# Altium PCB PCB1.PcbDoc
Units mil, origin at the board's own origin, x right, y up, seen from the top; angles counter-clockwise.
Board outline 3450.03 x 1820.03 mil, 2 copper layers (Top Layer, Bottom Layer); 17 components, 11 nets, 40 pads, 0 vias.
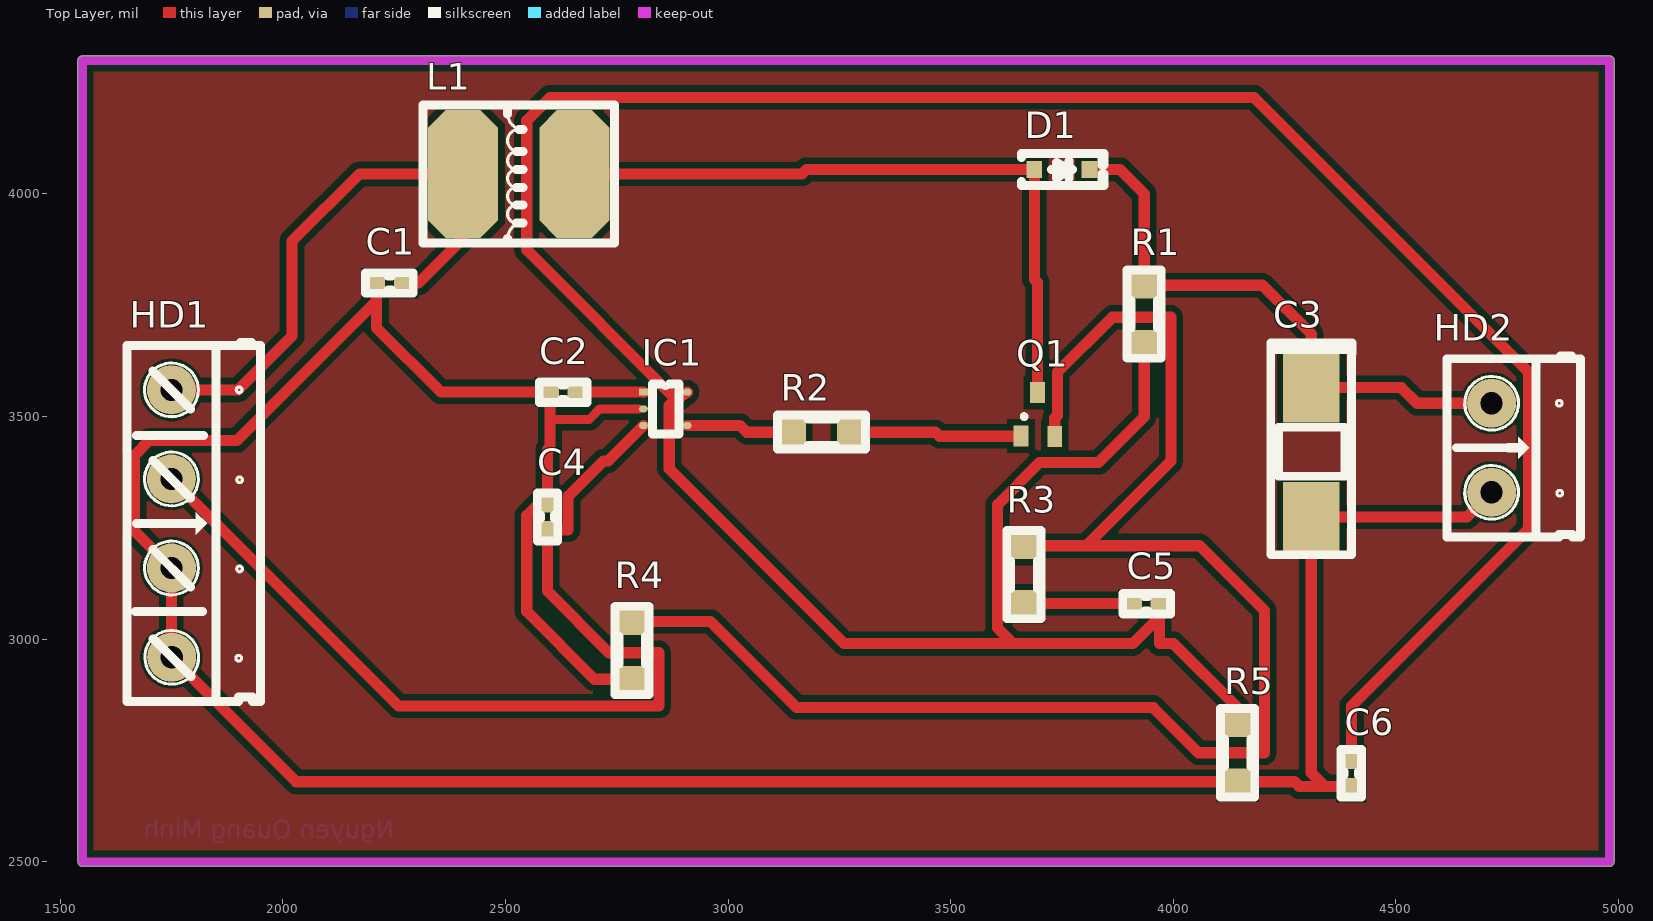
[diagram p0: Top Layer view]
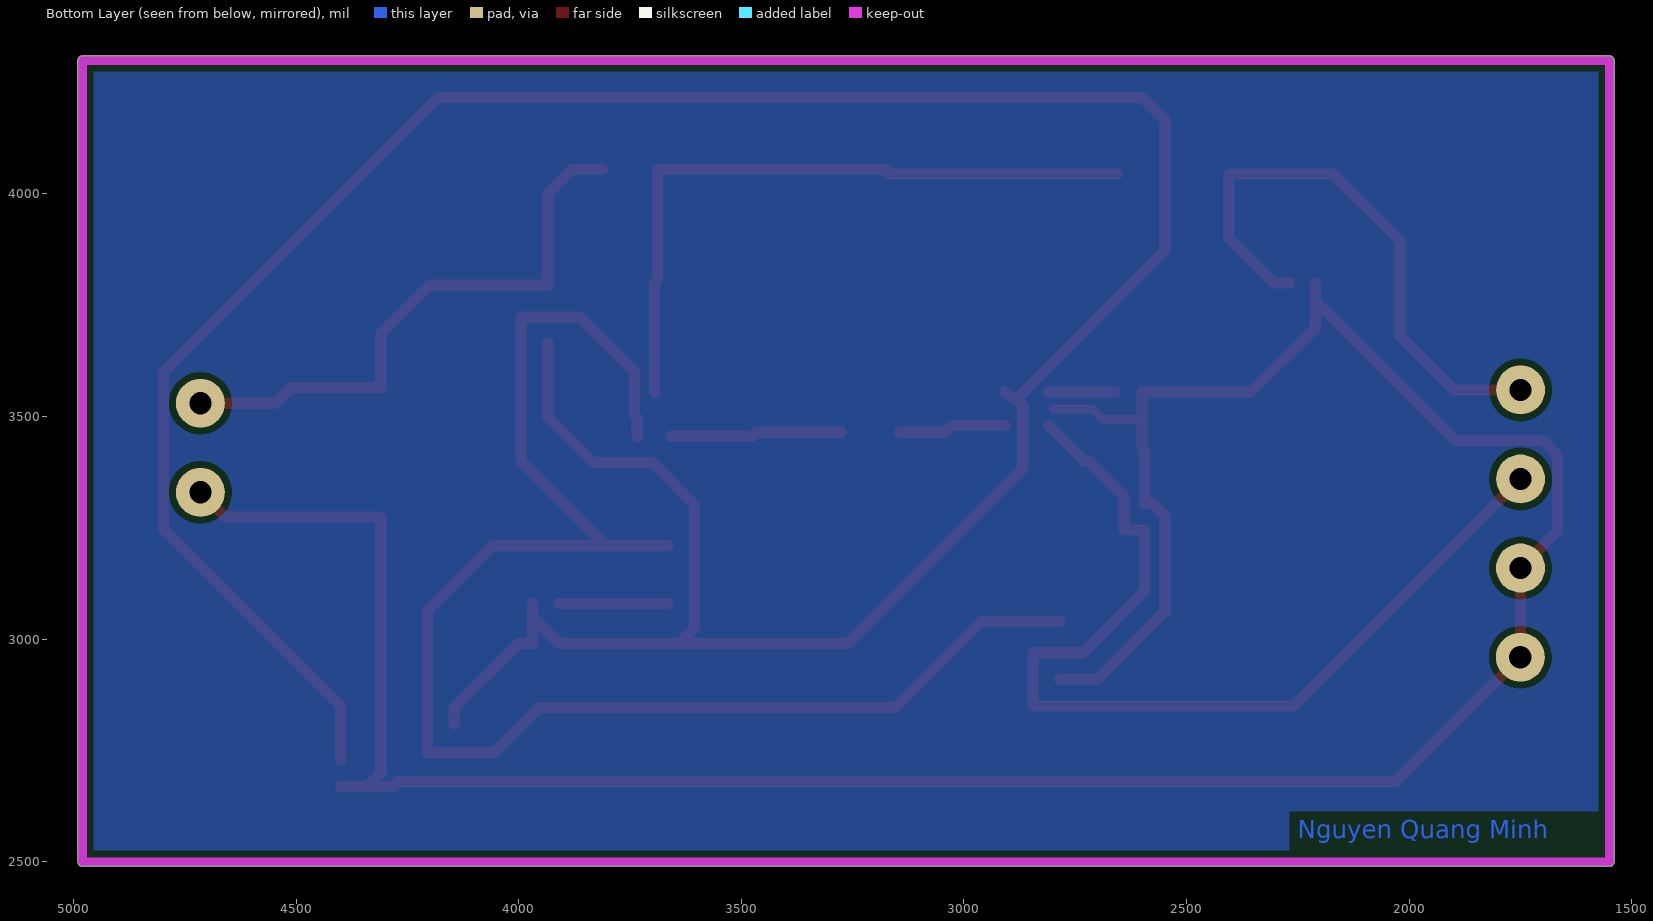
[diagram p1: Bottom Layer view, seen from below]
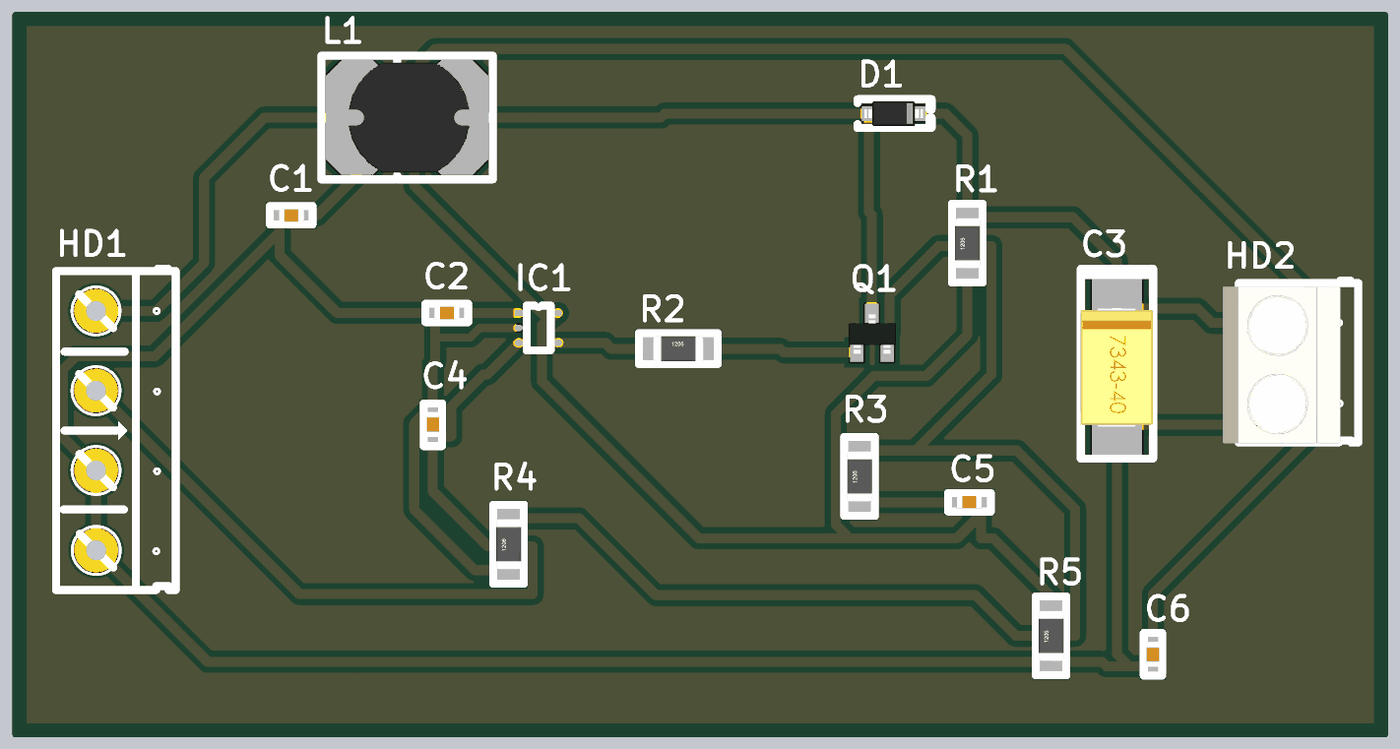
[diagram p2: 3D render of the assembled board from above, using the file's embedded part models]

## Layer stack, top to bottom
Top Solder: solder mask 0.4, Solder Resist, Dk 3.5
Top Layer: signal copper 1.4
Dielectric 1: dielectric 12.6, FR-4, Dk 4.8
Bottom Layer: signal copper 1.4
Bottom Solder: solder mask 0.4, Solder Resist, Dk 3.5

## Board outline
1550,2489.99 cw(c1550,2500) 1539.98,2500 1539.98,4300 cw(c1550,4300) 1550,4310.02 4980,4310.02 cw(c4980,4300) 4990.02,4300 4990.02,2500 cw(c4980,2500) 4980,2489.99

## Design rules (kind name [scope] priority, off if disabled: settings)
Clearance [All] p1: gap=15 ignorepadtopadclearanceinfootprint=FALSE
PolygonConnect [All] p1: connectstyle=Relief reliefconductorwidth=10 reliefentries=4 polygonreliefangle="90 Angle" airgapwidth=10
RoomDefinition "tu lam bai 1" [InComponentClass('tu lam bai 1')] p1: confinementstyle=ConfineIn formatcopy=TRUE lockcomponents=FALSE outline 11245,1310 10625,1310 10625,1985 11245,1985
RoutingLayers [All] p1: top layer_v5=TRUE bottom layer_v5=FALSE
RoutingVias [All] p1: holewidth=28 width=50 viastyle="Through Hole" minholewidth=28 minwidth=50 maxholewidth=28 maxwidth=50
SolderMaskExpansion [All] p1: expansion=4 istentingtop=FALSE
Width [All] p1: maxlimit=30 minlimit=20 preferedwidth=25
29 further rules are at their usual default settings.

## Components (designator, comment, footprint, x,y, rotation, side; value= is the part's Value field where it differs from the comment)
C1 "102" "tu 0603" 2240,3800 r180 top
C2 "102" "tu 0603" 2630,3555 r180 top
C3 "470uF" "tu tantalum smd7343" 4310,3420 r270 top
C4 "102" "tu 0603" 2594.53,3275 r270 top
C5 "102" "tu 0603" 3939.53,3080 r0 top
C6 "102" "tu 0603" 4400,2698.5 r90 top
D1 "S4" "DIODE SOD-123" 3750,4055 r0 top
HD1 "Header 4" HED4 1750,3560 r270 top
HD2 "Header 2" HED2 4715,3530 r270 top
IC1 "IRS2505" IRS2505 2810,3554.8 r0 top
L1 "47uH SMD" "Cuon Cam 7x7x5" 2380,4045 r270 top
Q1 "Si2302DS" SOT23 3695,3505 r0 top
R1 "1k" SM-RES-1206 3935,3665 r90 top value="R1/4W - 1K"
R2 "1k" SM-RES-1206 3145,3465 r0 top value="R1/4W - 1K"
R3 "1k" SM-RES-1206 3665,3080 r90 top value="R1/4W - 1K"
R4 "1k" SM-RES-1206 2785,2910 r90 top value="R1/4W - 1K"
R5 "1k" SM-RES-1206 4145,2680 r90 top value="R1/4W - 1K"

## Footprints (in the part's own frame and the unit in brackets; to place one, negate y for a bottom-side part, rotate by r counter-clockwise, add the part's x,y. Pads: shape width x height; smd on the part's side, far side on the other; paste and mask are expansions set on the pad)
"Cuon Cam 7x7x5" [mm] "Cuon Cam 7x7x5"
  oct 7.3x4 smd: 1(0,0.635) 2(0,6.985)
  silkscreen extent -3.94,-1.65 3.94,9.27, body extent -3.5,0.07 3.5,7.8, height 5.02
"DIODE SOD-123" [mm] "SOD-123"
  rect 0.9x0.95 smd: 1(-1.575,0) 2(1.575,0)
  silkscreen extent -2.3,-0.92 2.41,0.92, body extent -1.86,-0.78 1.86,0.77, height 1.35
HED2 [mil] "Header 2, 2 pin, hight 300mil, Pin to Pin 200, Colour Green"
  round 110 hole 50: 1(0,0) 2(200,0)
  silkscreen extent -106,-100 300,200, body extent -92,-140 302,155, height 394
HED4 [mil] "Header 4, 4 pin, hight 300mil, Pin to Pin 200, Colour Green"
  round 110 hole 50: 1(0,0) 2(200,0) 3(400.06,0.06) 4(600.39,0.39)
  silkscreen extent -106,-100 700,200
IRS2505 [mm]
  rect 0.5x0.4 smd: 1(0,0)
  oval 0.5x0.4 smd: 2(0,-0.95) 3(0,-1.9) 4(2.5,-1.9) 5(2.5,0)
  silkscreen extent 0.51,-2.37 2.03,0.48
SM-RES-1206 [mil]
  rect 60x65 smd: 1(0,0) 2(130,0)
  silkscreen extent -34,-38 164,39, body extent 2,-31 128,32, height 40
SOT23 [mm] "SOT 23 _ 1-3-2"
  rect 0.85x1.2 smd: 1(-0.94,-1.245) 2(0.986,-1.25) 3(0.005,1.25)
  silkscreen extent -0.88,-0.25 -0.64,0, body extent -1.47,-1.33 1.53,1.17, height 1.06
"tu 0603" [mm] "Chip Capacitor, 2-Leads, Body 1,60x0,80mm, IPC Medium Density"
  rect 1x0.95 smd mask+0.076: 1(-0.75,0) 2(0.75,0)
  silkscreen extent -1.35,-0.58 1.37,0.58, body extent -0.8,-0.4 0.8,0.4, height 0.9
"tu tantalum smd7343" [mm]
  rect 4x3.2 smd: 1(-3.7,0) 2(3.7,0)
  silkscreen extent -6.23,-2.31 5.85,2.31, body extent -3.75,-2.33 3.85,2.27, height 3.99

## Part data
C1 C2 C4 C5 C6: library part "Tu 0603 102 50V 10%", "Dán", Chung_Loai=Dán, Don_Vi=Con, Ma_Hang=MH004566, So_Chan=2, Ten_Linh_Kien="Tụ 0603 102-1nF 10% 50V"
C3: library part "Tu tantalum 470uF 10V SMD7343", "Dán", Chung_Loai=Dán, Don_Vi=Con, Ma_Hang=MH001956, So_Chan=2, Ten_Linh_Kien="Tụ tantalum 477A-470uF 10V SMD7343"
D1: library part "Diode S4", "Dán", Chung_Loai=Dán, Don_Vi=Con, Ma_Hang=MH005519, Ten_Linh_Kien="Diode S4 SOD123 ( 1N5819 SOD123)"
HD1: library part Hed4, "Header 4 (Green)"
HD2: library part Hed2, "Header 2 (Green)"
L1: library part "CUON CAM 47uH SMD", "Dán", Chung_Loai=Dán, Don_Vi=Con, Ma_Hang=MH004211, Ten_Linh_Kien="Cuộn Cảm 47uH 7x7x4MM CD74R"
Q1: "N-Channel MOSFET", LatestRevisionDate=17-Jul-2002, LatestRevisionNote="Re-released for DXP Platform.", PackageDescription="TO, Flat Index; 3 In-Line, Axial Leads; Body Dia. 4.6mm; Lead Dia. 0.5 mm (max)", PackageReference=E3, PackageVersion=1995/1996, Published=8-Jun-2000, Publisher="Altium Limited"
R1 R2 R3 R4 R5: library part R, "Resistor 1/4W"

## Nets (pads, with @x,y where several pads share a name; then routed paths per layer and width w, separated by ;. In a path a pad name is that pad's centre, name@x,y a point inside that pad or via, vN(x,y) a via of type N, cw(c..) or ccw(c..) an arc to the next point about the centre after c; other vN are vias at no path point)
NetC1_1: C1.1 HD1.1 L1.1 | length 1302.6
  Top Layer w25: HD1.1 1900,3560 2021,3681 2021,3894 2172,4045 L1.1 2405,3900 2305,3800 C1.1
NetC1_2: C1.2 C2.2 C3.2 C4.1 C6.1 HD1.3 HD1.4 HD2.2 IC1.2 R4.1 R5.1 | length 6577.1
  Top Layer w20: 2600.47,3493.47 2688.32,3493.47 2712.15,3517.3 2799.8,3517.3 2800,3517.5
  Top Layer w25: C1.2 2210.47,3759.47 ; R4.1 2700,2910 2548,3062 2548,3277.53 2575,3304.53 C4.1 2594.53,3426 2600.47,3431.94 2600.47,3493.47 C2.2 2355,3555 2210.47,3699.53 2210.47,3759.47 ; C6.1 4341.03,2668.97 ; HD2.2 4659.33,3274.33 C3.2 4310,2700 4341.03,2668.97 ; 2210.47,3759.47 1897,3446 1700,3446 1667,3413 1667,3243 HD1.3 1750.06,3059.33 1750.39,3059 HD1.4 2030,2680 R5.1 4272,2680 4283.03,2668.97 4341.03,2668.97
NetC2_1: C2.1 IC1.1 | length 150.6
  Top Layer w25: C2.1 2809.8,3555 IC1.1
NetC3_1: C3.1 D1.2 HD2.1 R1.2 | length 1310.4
  Top Layer w25: D1.2 3880,4055 3935,4000 R1.2 4200,3795 4310,3685 C3.1 4512,3565.67 4547.67,3530 HD2.1
NetC4_2: C4.2 HD1.2 IC1.3 | length 2227.9
  Top Layer w25: HD1.2 2260,2850 2845,2850 2845,2969.56 2733.03,2969.56 2594.53,3108.06 C4.2 2641,3245.47 2641,3321 2720.5,3400.5 2730.5,3400.5 IC1.3
NetC5_1: C5.1 R3.1 | length 245
  Top Layer w25: R3.1 C5.1
NetC5_2: C5.2 C6.2 IC1.5 R1.1 R5.2 | length 7073.5
  Top Layer w25: 2884.32,3537.03 IC1.5 ; R1.1 3935,3500 3832,3397 3700,3397 3605,3302 3605,3025 3639.94,2990.06 ; C5.2 3969.06,3050 ; R5.2 4145,2845 4000,2990 3969.06,2990 3969.06,3050 ; C6.2 4400,2850 4798,3248 4798,3600 4181,4217 2600,4217 2548,4165 2548,3874 2882.5,3539.5 2868,3525 2868,3383 3260.94,2990.06 3639.94,2990.06 ; 3639.94,2990.06 3909.11,2990.06 3969.06,3050
NetD1_1: D1.1 L1.2 Q1.3 | length 1540.9
  Top Layer w25: L1.2 3166,4045 3176,4055 D1.1 3687.99,3808.21 3695.2,3801 Q1.3
NetIC1_4: IC1.4 R2.1 | length 242.8
  Top Layer w25: IC1.4 3027,3480 3042,3465 R2.1
NetQ1_1: Q1.1 R2.2 | length 386.7
  Top Layer w25: R2.2 3466,3465 3475,3456 Q1.1
NetQ1_2: Q1.2 R3.2 R4.2 | length 3506.1
  Top Layer w25: R4.2 2961,3040 3154,2847 3955,2847 4057,2745 4205,2745 4205,3064 4059,3210 3805,3210 ; R3.2 3805,3210 ; Q1.2 3733.8,3496.8 3740,3503 3740,3600 3863,3723 3995,3723 3995,3400 3805,3210

## Polygon pours and split planes (outlines as drawn)
no net on Bottom Layer "NONET_L02_P000" (solid, pour order 0): 1550,4300 4970,4300 4980,4290 4980,2495 1560,2495 1555,2500
no net on Top Layer "NONET_L01_P001" (solid, pour order 1): 1555,4305 1565,4295 4980,4295 4980,2500 4975,2505 1550,2505

## Keep-outs
Keep-Out Layer:
  lines w20: 1550,2500 1550,4300 4980,4300 4980,2500 1550,2500

## Other copper
Bottom Layer:
  text "Nguyen Quang Minh" at 2250,2553.33 h40